# Altium PCB PCB1.PcbDoc
Units mil, origin at the board's own origin, x right, y up, seen from the top; angles counter-clockwise.
Board outline 5117.51 x 6310.03 mil, 2 copper layers (Top Layer, Bottom Layer); 27 components, 56 nets, 227 pads, 110 vias.
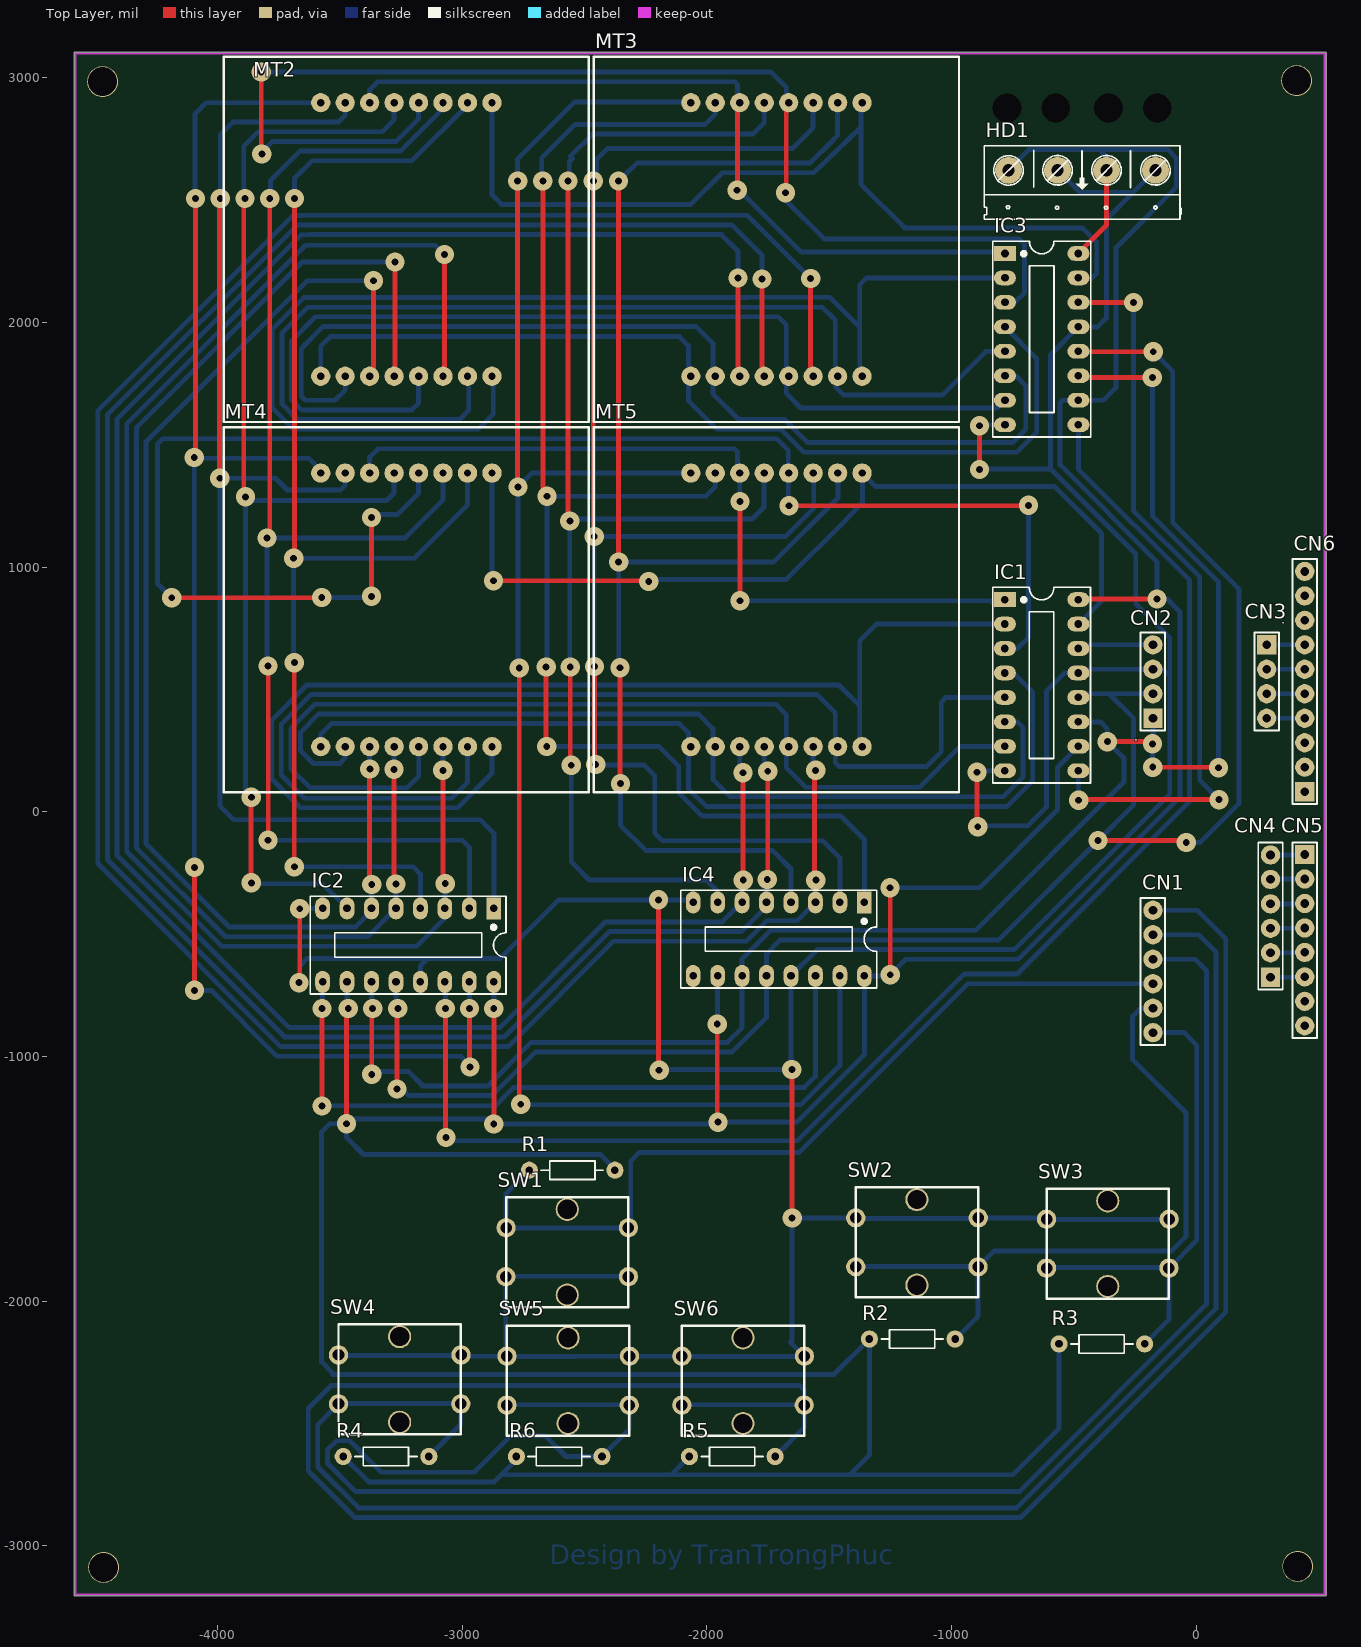
[diagram p0: Top Layer view]
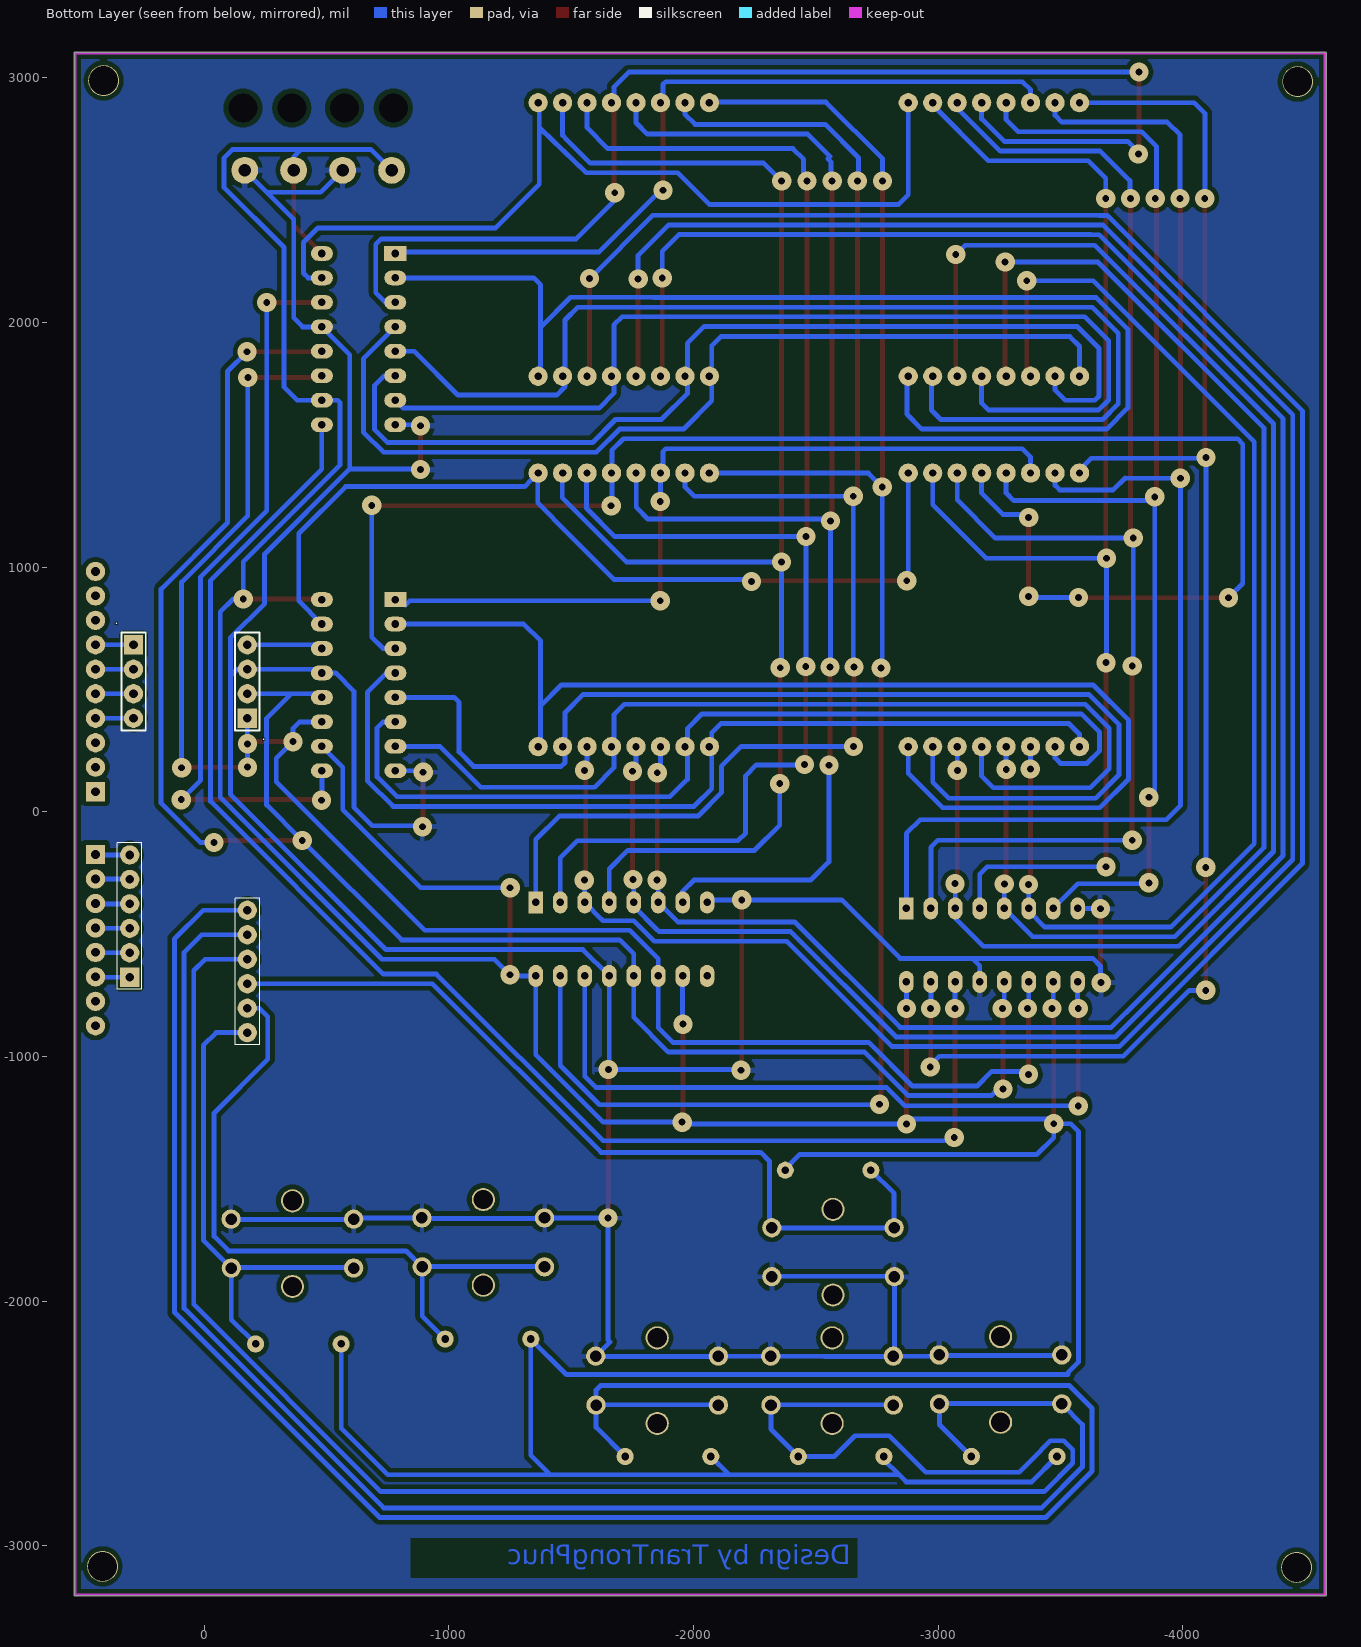
[diagram p1: Bottom Layer view, seen from below]
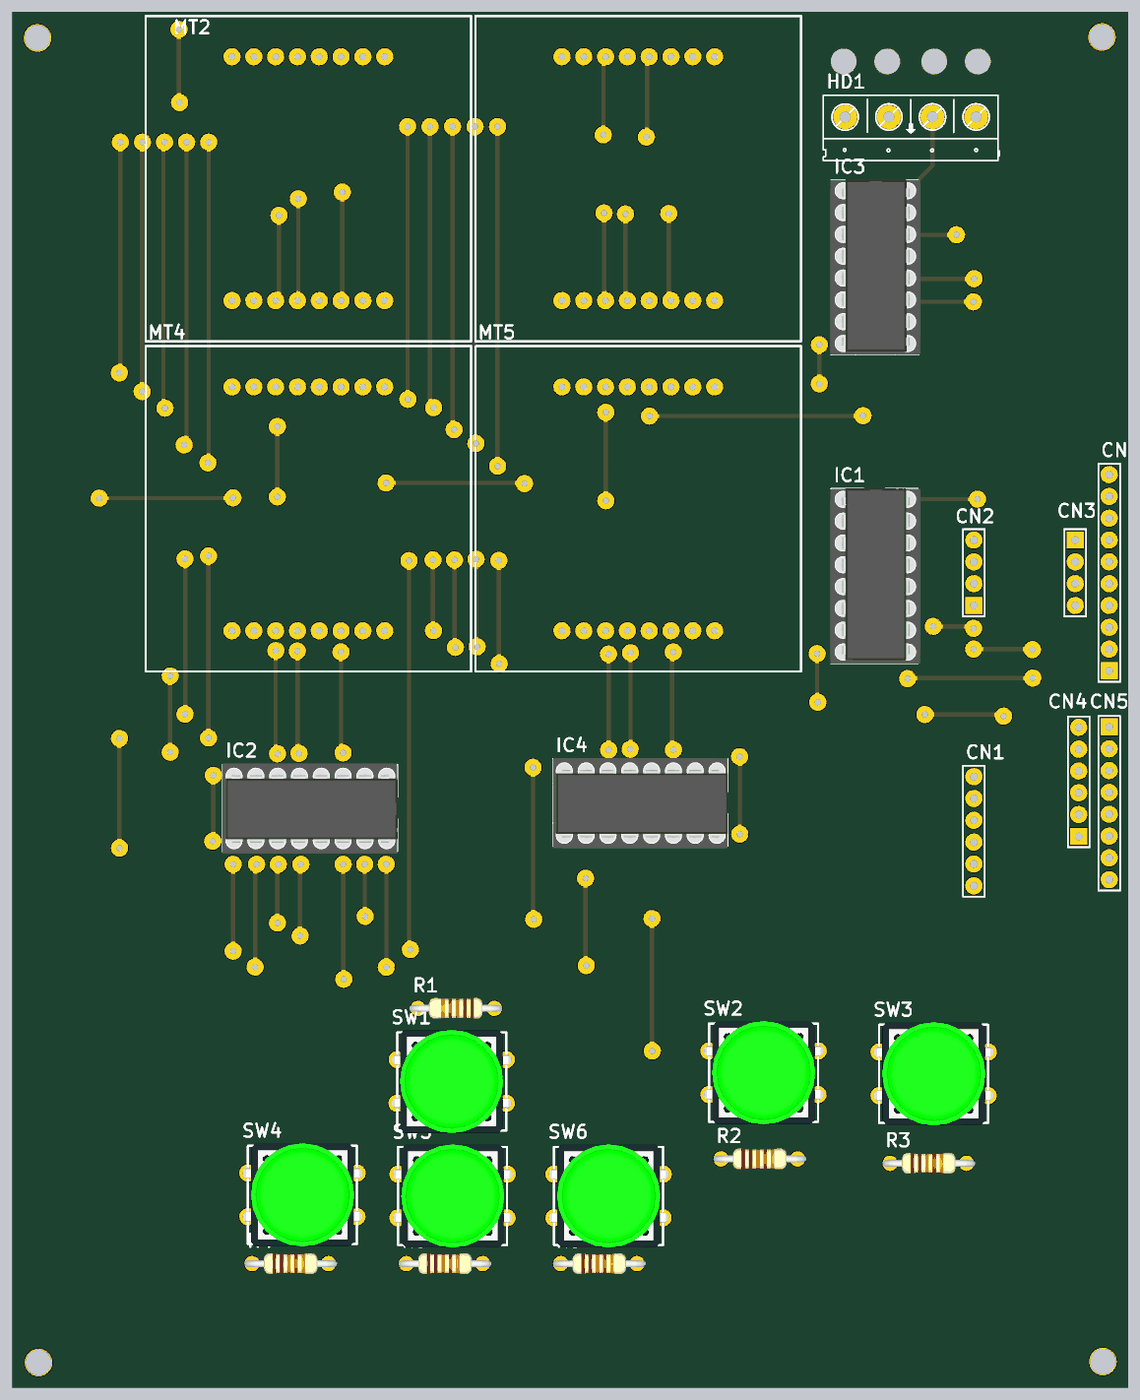
[diagram p2: 3D render of the assembled board from above, using the file's embedded part models]

## Layer stack, top to bottom
Top Solder: solder mask 0.4, Solder Resist, Dk 3.5
Top Layer: signal copper 1.4
Dielectric 1: dielectric 12.6, FR-4, Dk 4.8
Bottom Layer: signal copper 1.4
Bottom Solder: solder mask 0.4, Solder Resist, Dk 3.5

## Board outline
-4580.71,-3205.01 cw(c-4580.71,-3200) -4585.72,-3200 -4585.72,3100 cw(c-4580.71,3100) -4580.71,3105.02 526.77,3105.02 cw(c526.77,3100) 531.79,3100 531.79,-3200 cw(c526.77,-3200) 526.77,-3205.01

## Design rules (kind name [scope] priority, off if disabled: settings)
Clearance [All] p1: gap=19.68 ignorepadtopadclearanceinfootprint=FALSE
PolygonConnect [All] p1: connectstyle=Relief reliefconductorwidth=19.68 reliefentries=4 polygonreliefangle="90 Angle" airgapwidth=19.68
RoutingVias [All] p1: holewidth=28 width=78.74 viastyle="Through Hole" minholewidth=28 minwidth=78.74 maxholewidth=28 maxwidth=78.74
ShortCircuit [All] p1 off: allowed=FALSE
SolderMaskExpansion [All] p1: expansion=4
Width [All] p1: maxlimit=19.68 minlimit=19.68 preferedwidth=19.68
29 further rules are at their usual default settings.

## Components (designator, comment, footprint, x,y, rotation, side; value= is the part's Value field where it differs from the comment)
CN1 "IO" CON.HDR1X6#1 -176.3,-402.72 r270 top
CN2 "IO" CON.HDR1X4 -176.3,382.28 r90 top
CN3 "IO" CON.HDR1X4 288.7,682.28 r270 top
CN4 "IO" CON.HDR1X6#2 304.33,-676.38 r90 top
CN5 "CON.HDR1x8" HDR1X8 444.09,-174.8 r270 top
CN6 "CON.HDR1x10" HDR1X10 444.09,82.28 r90 top
HD1 "Header 4" HED4 -165.94,2621.85 r180 top
IC1 "74HC595" DIP16 -781.3,867.28 r270 top
IC2 "74HC595" DIP16 -2870,-395 r180 top
IC3 "74HC595" DIP16 -780.94,2281.85 r270 top
IC4 "74HC595" DIP16 -1355.51,-370.63 r180 top
MT2 "Matrix 8x8S" matrix -3227.56,2338.98 r0 top
MT3 "Matrix 8x8S" matrix -1714.96,2338.98 r0 top
MT4 "Matrix 8x8S" matrix -3227.56,825.2 r0 top
MT5 "Matrix 8x8S" matrix -1714.96,825.2 r0 top
R1 "1k" R1/4W -2725,-1465 r0 top value="R1/4W - 1K"
R2 "1k" R1/4W -985,-2155 r180 top value="R1/4W - 1K"
R3 "1k" R1/4W -210,-2175 r180 top value="R1/4W - 1K"
R4 "1k" R1/4W -3135.63,-2635 r180 top value="R1/4W - 1K"
R5 "1k" R1/4W -1720.63,-2635 r180 top value="R1/4W - 1K"
R6 "1k" R1/4W -2428.13,-2635 r180 top value="R1/4W - 1K"
SW1 "SW-4P-B" SW-4P-B -2571,-1800 r180 top
SW2 "SW-4P-B" SW-4P-B -1140,-1760 r0 top
SW3 "SW-4P-B" SW-4P-B -360,-1765 r0 top
SW4 "SW-4P-B" SW-4P-B -3254,-2320 r0 top
SW5 "SW-4P-B" SW-4P-B -2565.63,-2325 r0 top
SW6 "SW-4P-B" SW-4P-B -1850.63,-2325 r0 top

## Footprints (in the part's own frame and the unit in brackets; to place one, negate y for a bottom-side part, rotate by r counter-clockwise, add the part's x,y. Pads: shape width x height; smd on the part's side, far side on the other; paste and mask are expansions set on the pad)
CON.HDR1X4 [mm]
  rect 2x2 hole 0.9: 1(0,0)
  round 2 hole 0.9: 2(2.54,0) 3(5.08,0) 4(7.62,0)
  silkscreen extent -1.27,-1.27 8.89,1.27, body extent -1.27,-1.27 8.89,1.27, height 8.89
CON.HDR1X6#1 [mm]
  round 2 hole 0.9: 1(0,0) 2(2.54,0) 3(5.08,0) 4(7.62,0) 5(10.16,0) 6(12.7,0)
  silkscreen extent -1.27,-1.27 13.97,1.27, body extent -1.27,-1.27 13.97,1.27, height 8.89
CON.HDR1X6#2 [mm]
  rect 2x2 hole 0.9: 1(0,0)
  round 2 hole 0.9: 2(2.54,0) 3(5.08,0) 4(7.62,0) 5(10.16,0) 6(12.7,0)
  silkscreen extent -1.27,-1.27 13.97,1.27, body extent -1.27,-1.27 13.97,1.27, height 8.89
DIP16 [mil]
  rect 60x90 hole 31: 1(0,0)
  oval 60x90 hole 31: 2(100,0) 3(200,0) 4(300,0) 5(400,0) 6(500,0) 7(600,0) 8(700,0) 9(700,300) 10(600,300) 11(500,300) 12(400,300) 13(300,300) 14(200,300) 15(100,300) 16(0,300)
  silkscreen extent -50,-50 750,350, body extent -52,-53 752,360, height 317
HDR1X8 [mm] "Connector; Header; 8 Position"
  rect 2x2 hole 0.9: 1(0,0)
  round 2 hole 0.9: 2(2.54,0) 3(5.08,0) 4(7.62,0) 5(10.16,0) 6(12.7,0) 7(15.24,0) 8(17.78,0)
  silkscreen extent -1.27,-1.27 19.05,1.27
HDR1X10 [mm] "Connector; Header; 10 Position"
  rect 2x2 hole 0.9: 1(0,0)
  round 2 hole 0.9: 2(2.54,0) 3(5.08,0) 4(7.62,0) 5(10.16,0) 6(12.7,0) 7(15.24,0) 8(17.78,0) 9(20.32,0) 10(22.86,0)
  silkscreen extent -1.27,-1.27 24.13,1.27
HED4 [mil] "Header 4, 4 pin, hight 300mil, Pin to Pin 200, Colour Green"
  round 110 hole 50: 1(0,0) 2(200,0) 3(400.06,0.06) 4(600.39,0.39)
  silkscreen extent -106,-100 700,200
matrix [mm]
  round 2 hole 0.762: 1(-8.89,-14.2) 2(-6.35,-14.2) 3(-3.81,-14.2) 4(-1.27,-14.2) 5(1.27,-14.2) 6(3.81,-14.2) 7(6.35,-14.2) 8(8.89,-14.2) 9(8.89,14.2) 10(6.35,14.2) 11(3.81,14.2) 12(1.27,14.2) 13(-1.27,14.2) 14(-3.81,14.2) 15(-6.35,14.2) 16(-8.89,14.2)
  silkscreen extent -18.95,-18.95 18.95,18.95
R1/4W [mil] "R 1/4W, 2 Pin, 350mil"
  round 70 hole 31: 1(0,0) 2(350,0)
  silkscreen extent 48,-38 302,38, body extent -40,-47 386,47, height 111
SW-4P-B [mm] "Nut bam lon"
  round 2 hole 1.2: 1(-6.375,2.54) 2(-6.375,-2.54) 3(6.325,-2.54) 4(6.35,2.54)
  round 2.4 hole 2: ""(-0.025,4.445) ""(-0.025,-4.445)
  silkscreen extent -6.38,-5.72 6.32,5.72, body extent -6.94,-6 6.94,6, height 9.5

## Part data
CN1 CN4: library part CON.HDR1x6, "Header 1x6", ComponentLink1Description="Digikey Part link", ComponentLink2Description="Open DataSheet", ComponentLink2URL=H:\LIBRARY\LIBRARY.Datasheet\, Publisher="Hoang Nguyen"
CN2 CN3: library part CON.HDR1x4, "Header 1x4", ComponentLink1Description="Digikey Part link", ComponentLink2Description="Open DataSheet", ComponentLink2URL=H:\LIBRARY\LIBRARY.Datasheet\, Publisher="Hoang Nguyen"
CN5: "Header 1x8", ComponentLink1Description="Digikey Part link", ComponentLink2Description="Open DataSheet", ComponentLink2URL=H:\LIBRARY\LIBRARY.Datasheet\, Publisher="Hoang Nguyen"
CN6: "Header 1x10", ComponentLink1Description="Digikey Part link", ComponentLink2Description="Open DataSheet", ComponentLink2URL=H:\LIBRARY\LIBRARY.Datasheet\, Publisher="Hoang Nguyen"
HD1: "Header 4 (Green)"
IC1 IC2 IC3 IC4: library part 74595, "8 Bit Serial input - Parallel Output"
MT2 MT3 MT4 MT5: library part "LED 8x8S", "Matrix 8x8,  Single colour"
R1 R2 R3 R4 R5 R6: library part R1/4W, "Resistor 1/4W"
SW1 SW2 SW3 SW4 SW5 SW6: library part SW-4PIN-BIG, "Switch Big 4 Pin"

## Free pads (board coordinates)
  round 125.98 hole 118.11: 2(-4469.29,2984.09) 2(-4464.8,-3088.58) 2(410.87,2988.58) 2(415.35,-3084.09)
  round 60 hole 118.11: 2(415.35,-3084.09) 3(-773.23,2876.38) 3(-358.27,2876.38) 4(-573.62,2876.38) 4(-158.66,2876.38)

## Via types
v1: diameter 78.74, hole 28, Top Layer to Bottom Layer, 110 vias

## Nets (pads, with @x,y where several pads share a name; then routed paths per layer and width w, separated by ;. In a path a pad name is that pad's centre, name@x,y a point inside that pad or via, vN(x,y) a via of type N, cw(c..) or ccw(c..) an arc to the next point about the centre after c; other vN are vias at no path point)
bottom: CN1.3 R6.1 SW5.2 SW5.3 | length 7661.3
  Bottom Layer w19.68: SW5.2 -2816.63,-2423.23 -2318.4,-2423.23 SW5.3 -2316.63,-2523.5 R6.1 -2575,-2635 -2660,-2550 -2800,-2550 -2949.53,-2699.53 -3330.47,-2699.53 -3421.1,-2608.9 -3421.1,-2608.27 -3458.9,-2570.47 -3512.36,-2570.47 -3550.16,-2608.27 -3550.16,-2639.05 -3550.16,-2661.73 -3433.62,-2778.27 -722.01,-2778.27 42.52,-2013.74 42.52,-648.82 -3.58,-602.72 CN1.3
c1: IC2.15 MT2.16 MT4.16 | length 6263.8
  Top Layer w19.68: v1(-4094.49,1448.03) -4089.76,1452.76 v1(-4089.76,2506.3) ; v1(-4093.7,-227.17) -4093.7,-729.53 v1(-4093.31,-729.92) ; v1(-2969.29,-804.33) -2969.29,-1040.95 v1(-2967.32,-1042.91)
  Bottom Layer w19.68: v1(-4094.49,1448.03) v1@-4094.49,1444.49 ; v1(-4093.7,-227.17) -4090.16,-227.17 -4094.49,-222.83 v1@-4094.49,1444.49 ; v1(-4093.31,-729.92) -4025.76,-729.92 -3756.47,-999.21 -3004.72,-999.21 -2967.32,-1036.61 v1(-2967.32,-1042.91) ; v1(-4089.76,2506.3) -4090.94,2507.49 -4090.94,2853.54 -4046.46,2898.03 MT2.16@-3578.35,2898.03 ; MT4.16@-3577.56,1396.06 -3625.98,1444.49 v1@-4094.49,1444.49 ; MT2.16 MT2.16@-3578.35,2898.03 ; MT2.16@-3577.56,2898.82 MT2.16@-3578.35,2898.03 ; IC2.15 -2970,-797.71 v1@-2969.29,-798.42
c2: IC2.1 MT2.15 MT4.15 | length 5414.6
  Top Layer w19.68: v1@-3990.94,2493.7 -3990.94,1364.17 v1(-3989.76,1362.99)
  Bottom Layer w19.68: v1@-3990.94,2493.7 v1@-3990.94,2506.3 ; v1(-3988.48,2506.3) -3988.48,2766.25 -3936.22,2818.5 -3505.12,2818.5 -3477.56,2846.06 MT2.15 MT2.15@-3477.56,2898.82 ; MT4.15@-3477.56,1396.06 MT4.15 -3477.56,1333.86 -3496.06,1315.35 -3715.35,1315.35 -3764.17,1364.17 -3765.35,1362.99 v1(-3989.76,1362.99) -3989.76,25.2 -3932.28,-32.28 -2925.91,-32.28 -2870,-88.19 IC2.1
c3: IC2.2 MT2.11 MT4.11 | length 5543.9
  Top Layer w19.68: v1(-3797.24,1118.5) -3785.92,1129.82 v1(-3785.92,2506.3) ; v1(-3793.31,-116.14) -3792.13,-114.96 -3792.13,594.49 v1(-3793.31,595.67)
  Bottom Layer w19.68: v1(-3793.31,595.67) -3797.24,599.61 v1(-3797.24,1118.5) -3233.62,1118.5 -3077.56,1274.57 MT4.11 MT4.11@-3077.56,1396.06 ; v1@-3784.25,-116.14 -2998.86,-116.14 -2970,-145 IC2.2 ; v1@-3783.46,2498.81 -3783.46,2579.54 -3662.6,2700.39 -3253.38,2700.39 -3077.56,2876.21 MT2.11 MT2.11@-3077.56,2898.82
c4: IC2.3 MT2.6 MT4.6 | length 6087.1
  Top Layer w19.68: v1@-3077.56,-293.7 v1@-3077.56,169.29 ; MT2.6@-3072.64,1769.49 -3067.64,1774.49 -3072.05,1778.9 v1(-3072.05,2277.56)
  Bottom Layer w19.68: v1(-3078.35,169.29) -3077.56,170.08 MT4.6 ; v1(-3072.05,2277.56) -3110.24,2315.75 -3639.76,2315.75 -4370.47,1585.04 -4370.47,-162.5 -3982.97,-550 -3185,-550 -3070,-435 IC2.3 -3070,-295.2 v1(-3068.5,-293.7)
c5: IC2.4 MT2.10 MT4.10 | length 5273.5
  Top Layer w19.68: v1(-3688.19,1036.22) -3688.19,1047.95 -3684.65,1051.5 v1(-3684.65,2506.3) ; v1(-3685.43,-225) v1(-3685.43,609.45) ; v1@-3681.1,-214.17 -3672.64,-222.64 v1@-3675,-225
  Bottom Layer w19.68: v1(-3685.43,609.45) -3688.19,612.2 v1(-3688.19,1036.22) -3195.91,1036.22 -2977.56,1254.57 MT4.10 MT4.10@-2977.56,1396.06 ; v1(-3684.65,2506.3) -3684.65,2589.37 -3612.99,2661.02 -3205.12,2661.02 -2977.56,2888.58 MT2.10 MT2.10@-2977.56,2898.82 ; v1@-3675,-225 -3200,-225 -3170,-255 IC2.4
c6: IC2.5 MT2.4 MT4.4 | length 5459.9
  Top Layer w19.68: v1@-3277.56,-295.67 v1@-3277.56,173.23 ; v1(-3273.62,2246.85) -3273.62,1779.92 -3278.35,1775.2 MT2.4@-3272.64,1769.49
  Bottom Layer w19.68: v1(-3278.34,173.23) -3277.56,174.01 MT4.4 ; v1(-3273.62,2246.85) -3652.98,2246.85 -4331.1,1568.73 -4331.1,-146.19 -3966.66,-510.63 -3385.63,-510.63 IC2.5 -3270,-298.5 -3272.83,-295.67 v1(-3270.47,-295.67)
c7: IC2.6 MT2.3 MT4.3 | length 5011.9
  Top Layer w19.68: v1@-3377.56,-297.64 v1@-3377.56,175.2 ; MT2.3@-3372.64,1769.49 -3362.2,1779.92 v1(-3362.2,2170.47)
  Bottom Layer w19.68: MT4.3 -3377.56,175.98 v1(-3376.77,175.2) ; v1(-3368.9,-297.64) -3370,-298.74 IC2.6 -3370,-405 -3436.26,-471.26 -3950.35,-471.26 -4291.73,-129.88 -4291.73,1511.81 -3633.07,2170.47 v1(-3362.2,2170.47)
c8: IC2.7 MT2.13 MT4.13 | length 4910.2
  Top Layer w19.68: v1@-3892.13,2496.06 -3892.13,1294.09 v1(-3885.04,1287.01) ; v1(-3861.02,-290.55) -3862.2,-289.37 -3862.2,57.87 v1(-3861.02,59.06)
  Bottom Layer w19.68: v1@-3892.13,2496.06 -3892.13,2719.29 -3832.28,2779.13 -3326.77,2779.13 -3277.56,2828.35 MT2.13 MT2.13@-3277.56,2898.82 ; v1@-3885.04,-294.09 -3570.91,-294.09 IC2.7 ; v1@-3885.04,69.68 v1(-3885.04,1287.01) -3869.68,1271.65 -3308.66,1271.65 -3277.56,1302.76 MT4.13 MT4.13@-3277.56,1396.06
  other v1: -3887.2,2506.3
c9: IC4.15 MT3.16 MT5.16 | length 7131.6
  Top Layer w19.68: v1(-2772.83,2577.95) -2772.83,1329.13 v1(-2771.26,1327.56) ; v1(-2766.14,587.8) -2766.14,-1188.98 v1(-2759.84,-1195.28)
  Bottom Layer w19.68: v1(-2772.83,2577.95) -2772.83,2668.5 -2540.94,2900.39 -2076.38,2900.39 MT3.16@-2074.8,2898.82 ; v1(-2766.14,587.8) -2771.26,592.91 v1(-2771.26,1327.56) -2714.57,1384.25 MT5.16 ; v1(-2759.84,-1195.28) -2757.87,-1197.24 -1615.69,-1197.24 -1455.51,-1037.07 IC4.15
c10: IC4.1 MT3.15 MT5.15 | length 5807.5
  Top Layer w19.68: v1(-2669.68,2577.95) -2669.68,1305.91 v1(-2653.15,1289.37) ; v1(-2656.29,591.34) -2656.29,269.29 v1(-2653.94,266.93)
  Bottom Layer w19.68: v1@-2674.4,2564.96 -2674.4,2672.45 -2537.8,2809.06 -2006.69,2809.06 -1964.96,2850.79 MT3.15 ; v1(-2656.29,591.34) -2656.29,600.01 -2653.15,603.15 v1(-2653.15,1289.37) -2003.54,1289.37 -1964.96,1327.95 MT5.15 ; v1(-2653.94,266.93) -2195.28,266.93 -2114.17,185.83 -2114.17,78.18 -2018.28,-17.72 -1451.18,-17.72 -1355.51,-113.39 IC4.1 ; MT5.15@-1974.8,1384.25 MT5.15@-1974.8,1396.06 ; MT3.15@-1974.8,2898.03 MT3.15@-1974.8,2898.82
c11: IC4.2 MT3.11 MT5.11 | length 6165
  Top Layer w19.68: v1@-2480,1129.92 v1@-2480,1125.28 ; v1@-2474.8,1150 -2474.8,1139.77 -2484.65,1129.92 v1@-2480,1125.28 ; v1(-2463.39,2577.95) -2463.39,1128.74 v1(-2459.45,1124.8) -2479.53,1124.8 v1@-2480,1125.28 ; v1(-2458.66,594.09) -2458.66,197.64 v1(-2453.94,192.91)
  Bottom Layer w19.68: v1(-2458.66,594.09) -2459.45,594.88 v1(-2459.45,1124.8) -1678.12,1124.8 -1562.6,1240.32 -1562.6,1383.86 MT5.11@-1574.8,1396.06 ; v1(-2453.94,192.91) -2452.36,191.34 -2257.09,191.34 -2212.6,146.85 -2212.6,-87.4 -2181.5,-118.5 -1525.2,-118.5 -1455.51,-188.19 IC4.2 ; v1@-2452.76,2575.2 v1@-2452.76,2577.95 ; v1@-2449.8,2577.95 -2449.8,2667.13 -2406.3,2710.63 -1650,2710.63 -1564.96,2795.67 MT3.11 ; MT3.11@-1574.8,2898.82 MT3.11@-1570.47,2894.49
c12: IC4.3 MT3.6 MT5.6 | length 9748.2
  Top Layer w19.68: v1(-1575.2,2179.13) -1575.2,1781.1 MT3.6@-1574.8,1780.71 ; v1@-1559.84,-283.86 -1559.84,169.29 v1@-1559.84,176.38
  Bottom Layer w19.68: v1(-1575.2,2179.13) -1834.25,2438.19 -3655.32,2438.19 -3656.11,2437.4 -3690.16,2437.4 -4488.58,1638.98 -4488.58,-211.42 -3740.16,-959.84 -2811.87,-959.84 -2381.4,-529.37 -1839.25,-529.37 -1755.04,-445.16 -1630.85,-445.16 ; MT5.6 -1564.96,181.5 -1554.72,171.26 v1(-1554.72,169.29) ; v1(-1553.94,-279.53) -1555.51,-281.1 IC4.3 -1625.51,-440.63 ; -1630.85,-445.16 -1626.33,-440.63 -1625.51,-440.63 ; -1630.85,-445.16 -1630.04,-445.16 -1625.51,-440.63
c13: IC4.4 MT3.10 MT5.10 | length 5775.1
  Top Layer w19.68: v1(-2360.24,2577.95) -2360.24,1021.65 v1(-2359.84,1021.26) ; v1(-2354.33,588.58) -2354.33,116.54 v1(-2352.76,114.96)
  Bottom Layer w19.68: v1@-2356.69,588.58 -2356.69,594.09 -2359.84,597.24 v1(-2359.84,1021.26) -1725.98,1021.26 -1463.39,1283.86 -1463.39,1384.65 MT5.10@-1474.8,1396.06 ; v1(-2352.76,114.96) -2352.76,-54.33 -2249.21,-157.87 -1731.5,-157.87 -1655.51,-233.86 IC4.4 IC4.4@-1647.64,-362.76 ; v1@-2342.13,2577.95 -2342.13,2595.28 -2286.22,2651.18 -1577.95,2651.18 -1481.89,2747.24 ; -1482.02,2747.37 -1464.96,2764.43 MT3.10 ; MT3.10@-1474.8,2898.03 MT3.10@-1474.8,2898.82
c14: IC4.5 MT3.4 MT5.4 | length 9249.2
  Top Layer w19.68: MT3.4@-1774.8,1780.71 -1774.02,1781.5 -1780.71,1788.19 -1773.62,1795.28 v1(-1773.62,2177.16) ; v1@-1750.79,-286.22 v1@-1750.79,157.09
  Bottom Layer w19.68: v1(-1773.62,2177.16) -1773.62,2273.62 -1898.43,2398.43 -3639.41,2398.43 -3639.8,2398.03 -3673.85,2398.03 -4449.21,1622.67 -4449.21,-195.11 -3723.85,-920.47 -2828.18,-920.47 -2397.71,-490 -1859.2,-490 -1850.74,-481.54 -1755.51,-386.31 IC4.5 -1755.51,-280.32 v1(-1752.36,-277.16) ; MT5.4 -1764.96,166.54 -1763.78,165.35 v1(-1750.39,165.35)
c15: IC4.6 MT3.3 MT5.3 | length 8889.2
  Top Layer w19.68: MT3.3@-1874.8,1780.71 -1864.57,1790.95 -1872.05,1798.43 v1(-1872.05,2181.5) ; v1@-1851.57,-282.68 v1(-1851.57,159.45)
  Bottom Layer w19.68: -3976.78,-611.87 -4409.84,-178.8 -4409.84,1606.36 -3657.54,2358.66 -3623.49,2358.66 -3623.1,2359.06 -1940.16,2359.06 -1872.05,2290.94 v1(-1872.05,2181.5) ; -3976.77,-611.87 -3818.64,-770 -3707.54,-881.1 -2844.49,-881.1 -2414.02,-450.63 -2173.62,-450.63 ; -2173.62,-450 -1935.7,-450 -1856.33,-370.63 IC4.6 -1855.51,-284.25 v1(-1850.79,-279.53) ; MT5.3 -1864.96,164.57 -1859.84,159.45 v1(-1851.57,159.45)
c16: IC4.7 MT3.13 MT5.13 | length 5577
  Top Layer w19.68: v1@-2567.71,1204.53 -2576.38,1195.87 -2569.09,1188.58 v1(-2559.45,1188.58) -2566.54,1195.67 v1(-2566.54,2577.95) ; v1(-2557.48,591.34) -2557.48,194.09 v1(-2553.54,190.16)
  Bottom Layer w19.68: v1@-2568.11,2570.47 v1@-2568.11,2577.95 ; v1@-2561.81,2575.19 -2561.81,2656.7 -2548.82,2669.68 -2557.48,2678.35 -2466.14,2769.69 -1811.02,2769.69 -1764.96,2815.75 MT3.13 ; v1(-2557.48,591.34) -2560.23,588.58 -2563.39,588.58 -2559.45,592.52 v1(-2559.45,1188.58) -2565.16,1188.58 -2573.03,1196.46 -1813.78,1196.46 -1765.75,1244.49 -1765.75,1387.01 MT5.13@-1774.8,1396.06 ; v1(-2553.54,190.16) -2553.54,-204.88 -2479.53,-278.9 -2002.24,-278.9 -1955.51,-325.63 IC4.7 ; MT3.13@-1774.8,2898.82 MT3.13@-1773.23,2897.24
chon: CN1.5 R2.1 SW2.2 SW2.3 | length 2825.9
  Bottom Layer w19.68: SW2.2 -1391,-1858.23 -892.77,-1858.23 SW2.3 ; R2.1 -891,-2061 SW2.3 ; CN1.5 -225.55,-802.72 -260.24,-837.4 -260.24,-1011.42 -40.55,-1231.1 -40.55,-1735.55 -100,-1795 -825,-1795 -890,-1860 SW2.3
chot: CN2.2 IC1.12 IC2.12 IC3.12 IC4.12 | length 7881.8
  Top Layer w19.68: v1(-3265.35,-1132.68) v1@-3265.35,-785.43 ; IC3.12 -479.41,1880.31 v1(-175.2,1880.31) ; v1(-400.79,-117.72) -47.64,-117.72 v1(-40.16,-125.2) ; CN2.2@-201.3,482.28 CN2.2 -166.3,472.28 -161.3,477.28 CN2.2@-158.82,474.8
  Bottom Layer w19.68: IC2.12 -3270,-774.88 v1@-3262.2,-782.68 ; v1(-3265.35,-1132.68) -3248.03,-1129.92 -3217.72,-1160.24 -2877.33,-1160.24 -2868.11,-1151.02 -2868.11,-1150.43 -2699.96,-982.28 -1897.24,-982.28 -1755.51,-840.55 IC4.12 -1755.51,-580.63 -1698.78,-523.9 -806.97,-523.9 v1(-400.79,-117.72) -255.12,27.95 -255.12,381.5 -355.91,482.28 ; IC1.12 -466.3,482.28 -355.91,482.28 ; CN2.2@-201.3,482.28 -355.91,482.28 ; v1(-175.2,1880.31) -95.28,1800.39 -95.28,1181.6 176.14,910.18 176.14,34.61 16.33,-125.2 v1(-40.16,-125.2)
  other v1: -3262.2,-804.33
data: CN2.4 IC1.14 | length 311.2
  Bottom Layer w19.68: IC1.14 -466.3,682.28 CN2.4
GND: CN2.3 HD1.1 HD1.3 IC1.8 IC1.13 IC2.8 IC2.13 IC3.8 IC3.13 IC4.8 IC4.13 SW1.1 SW1.4 SW2.1 SW2.4 SW3.1 SW3.4 SW4.1 SW4.4 SW5.1 SW5.4 SW6.1 SW6.4 | length 16917.7
  Top Layer w19.68: v1(-3666.14,-698.43) -3662.99,-695.28 v1(-3662.99,-396.46) ; v1(-2197.24,-360) -2197.24,-1053.54 v1(-2194.49,-1056.3) ; v1@-1655.51,-1689.76 -1650.79,-1685.04 v1(-1650.79,-1660.24) -1651.97,-1659.06 v1(-1651.97,-1053.15) ; IC4.13 IC4.13@-1655.51,-645.63 ; v1(-894.88,161.42) -894.88,-58.27 v1(-892.13,-61.02) ; v1(-884.64,1398.43) v1(-884.64,1577.95) ; IC1.8 IC1.8@-771.3,157.28
  Bottom Layer w19.68: v1(-3666.14,-698.43) -3662.99,-695.28 -3662.99,-630.32 -3631.89,-599.21 -3139.21,-599.21 ; v1(-3662.99,-396.46) -3656.69,-396.46 -3655.24,-395 IC2.8 ; SW4.1 -3505,-2221.77 -3005.77,-2221.77 SW4.4 -2999,-2225 SW5.1 ; IC2.13 -3170,-630 -3139.21,-599.21 ; SW1.1 -2321.77,-1898.23 -2821,-1898.23 SW1.4 -2821,-2220.63 SW5.1 ; v1(-2194.49,-1056.3) -2191.34,-1053.15 v1(-1651.97,-1053.15) -1655.51,-1049.61 IC4.13 -1548.15,-563.27 -743.13,-563.27 -107.4,72.46 -107.4,710.82 -246.85,850.27 -246.85,1053.51 -594.84,1401.5 ; IC4.8 -2066.14,-360 v1(-2197.24,-360) -2605,-360 -2844.21,-599.21 -3139.21,-599.21 ; v1(-894.88,161.42) -889.02,167.28 IC1.8 ; v1(-892.13,-61.02) -888.19,-57.09 -687.02,-57.09 -611.81,18.13 -611.81,492.52 -537.05,567.28 IC1.13 -466.3,582.28 CN2.3 -134.13,582.28 -111.3,559.45 ; v1(-884.64,1398.43) -883.86,1398.43 -882.68,1397.24 -882.68,1395.67 -876.84,1401.5 -594.84,1401.5 ; v1(-884.64,1577.95) -880.74,1581.85 IC3.8 ; HD1.3 -476.07,2531.85 -255.94,2531.85 ; HD1.1 -255.94,2531.85 ; SW3.4 -110,-1666.77 -609.23,-1666.77 SW3.1 -616,-1660 SW2.4 -890,-1661.77 -1389.23,-1661.77 SW2.1 -1391.24,-1660.24 v1(-1650.79,-1660.24) -1650.79,-2159.88 -1658.27,-2167.36 SW6.4 -1600.63,-2226.77 -2099.86,-2226.77 SW6.1 SW5.4 -2533.06,-2225 -2534.83,-2226.77 -2816.63,-2226.77 SW5.1 ; -594.84,1401.5 -594.84,1867.95 IC3.13 -402.4,1981.85 -365.94,2018.31 -365.94,2421.85 -255.94,2531.85
left: CN1.2 R4.1 SW4.2 SW4.3 | length 6886.6
  Bottom Layer w19.68: R4.1 -3005,-2504.37 SW4.3 -3006.77,-2418.23 -3505,-2418.23 SW4.2 -3589.53,-2504.53 -3589.53,-2678.04 -3422.56,-2845 -733.07,-2845 81.89,-2030.04 81.89,-574.02 10.59,-502.72 CN1.2
NetCN3_1: CN3.1 CN6.7 | length 155.4
  Bottom Layer w19.68: CN3.1 CN6.7
NetCN3_2: CN3.2 CN6.6 | length 155.4
  Bottom Layer w19.68: CN3.2 CN6.6
NetCN3_3: CN3.3 CN6.5 | length 155.4
  Bottom Layer w19.68: CN3.3 CN6.5
NetCN3_4: CN3.4 CN6.4 | length 155.4
  Bottom Layer w19.68: CN3.4 CN6.4
NetCN4_1: CN4.1 CN5.6 | length 140.4
  Bottom Layer w19.68: CN4.1 442.52,-676.38 CN5.6
NetCN4_2: CN4.2 CN5.5 | length 140.4
  Bottom Layer w19.68: CN4.2 442.52,-576.38 CN5.5
NetCN4_3: CN4.3 CN5.4 | length 140.4
  Bottom Layer w19.68: CN4.3 442.52,-476.38 CN5.4
NetCN4_4: CN4.4 CN5.3 | length 140.4
  Bottom Layer w19.68: CN4.4 442.52,-376.38 CN5.3
NetCN4_5: CN4.5 CN5.2 | length 140.4
  Bottom Layer w19.68: CN4.5 305.91,-274.8 CN5.2
NetCN4_6: CN4.6 CN5.1 | length 140.4
  Bottom Layer w19.68: CN4.6 442.52,-176.38 CN5.1
NetIC1_9: IC1.9 IC3.14 | length 3105.9
  Top Layer w19.68: IC3.14 v1(-255.94,2081.85) ; v1(-479.92,46.85) -477.17,49.61 v1(93.7,49.61)
  Bottom Layer w19.68: IC1.9 -481.3,48.23 v1(-479.92,46.85) ; v1@-250.28,2076.18 v1(-255.94,2081.85) -255.94,1230.91 14.8,960.17 14.8,128.5 v1(93.7,49.61)
NetIC2_9: IC2.9 IC4.14 | length 2986.8
  Top Layer w19.68: v1(-3572.44,-1202.36) v1(-3572.44,-804.33) v1@-3572.44,-777.95
  Bottom Layer w19.68: v1(-3572.44,-1202.36) -3571.65,-1201.57 -2862.99,-1201.57 -2828.74,-1167.32 -2828.74,-1166.74 -2788.38,-1126.38 -2731.3,-1126.38 -2730.91,-1126.77 -1600.89,-1126.77 -1555.51,-1081.39 IC4.14 ; v1@-3572.44,-777.95 -3570,-775.51 IC2.9
NetIC2_14: IC2.14 IC3.9 | length 6008.9
  Top Layer w19.68: v1(-3068.1,-804.33) -3068.1,-1309.3 -3074.4,-1315.6 -3065.35,-1324.65 v1(-3065.35,-1331.1)
  Bottom Layer w19.68: IC2.14 -3074.4,-699.4 -3052.76,-721.05 -3068.1,-736.4 v1(-3068.1,-804.33) ; v1(-3065.35,-1331.1) -3065.35,-1334.65 -3055.12,-1344.88 -1630.48,-1344.88 -948.95,-663.35 -731.85,-663.35 -26.38,42.13 -26.38,945.67 -480.94,1400.24 IC3.9
r1: IC1.15 MT4.9 MT5.9 | length 3701.9
  Top Layer w19.68: v1(-2871.26,944.09) -2239.37,944.09 v1(-2236.61,941.34)
  Bottom Layer w19.68: MT4.9 -2877.56,950.39 v1(-2871.26,944.09) ; v1(-2236.61,941.34) -2239.37,941.34 -2231.1,949.61 -1674.41,949.61 -1426.38,1197.64 -1426.38,1200 -1363.39,1262.99 -1363.39,1356.69 MT5.9@-1337.4,1356.69 ; MT5.9 MT5.9@-1337.4,1356.69 ; IC1.15 -386.3,862.28 -386.3,1137.28 -578.05,1329.04 -1309.74,1329.04 MT5.9@-1337.4,1356.69
r2: IC1.1 MT4.14 MT5.14 | length 3296.7
  Top Layer w19.68: v1@-1874.8,873.62 v1(-1863.78,862.6) v1(-1863.78,1267.72)
  Bottom Layer w19.68: MT4.14@-3377.56,1396.06 -3377.56,1449.37 -3342.91,1484.02 -1887.17,1484.02 -1874.8,1471.65 MT5.14@-1874.8,1396.06 ; v1@-1868.9,1267.72 -1864.96,1271.65 MT5.14 ; v1(-1863.78,862.6) -839.84,862.6 -822.91,845.67 -791.3,877.28 IC1.1
r3: IC1.2 MT4.8 MT5.8 | length 4909.5
  Bottom Layer w19.68: MT4.8@-2877.56,277.95 MT4.8 -2877.56,156.69 -3018.11,16.14 -3660.24,16.14 -3777.95,133.86 -3777.95,374.12 -3633.96,518.11 -1459.45,518.11 -1374.8,433.46 ; MT5.8@-1374.8,277.95 -1374.8,433.46 ; IC1.2 -1306.34,767.28 -1374.8,698.82 -1374.8,433.46
r4: IC1.3 MT4.12 MT5.12 | length 6613.7
  Top Layer w19.68: v1(-4186.61,874.41) -3573.23,874.41 -3565.75,866.93 -3565.75,868.11 v1(-3573.23,875.59) ; v1(-3369.68,880.31) v1(-3369.68,1202.76) ; v1(-1663.39,1250.79) -686.22,1250.79 v1(-684.65,1252.36)
  Bottom Layer w19.68: v1(-4186.61,874.41) -4245.11,932.91 -4245.11,1502.76 -4223.46,1524.41 -1713.78,1524.41 -1666.54,1477.17 -1666.54,1253.94 v1(-1663.39,1250.79) ; v1(-3573.23,875.59) -3374.41,875.59 v1(-3369.68,880.31) ; v1@-3371.26,1202.76 -3359.53,1214.49 -3265.04,1214.49 -3177.56,1301.97 MT4.12 MT4.12@-3177.56,1396.06 ; IC1.3 -731.3,667.28 -684.65,713.94 v1(-684.65,1252.36)
r5: IC1.4 MT4.1 MT5.1 | length 3794.1
  Bottom Layer w19.68: MT4.1@-3577.56,277.95 -3577.56,317.72 -3534.65,360.63 -2111.81,360.63 -2074.8,323.62 -2074.8,94.49 -2001.97,21.65 -772.07,21.65 -667.4,126.32 -667.4,487.98 -746.71,567.28 IC1.4
r6: IC1.5 MT4.7 MT5.7 | length 4676.4
  Bottom Layer w19.68: MT4.7@-2977.56,277.95 MT4.7 -2977.56,120.87 -3042.91,55.51 -3643.93,55.51 -3738.58,150.17 -3738.58,357.81 -3617.65,478.74 -1548.03,478.74 -1474.8,405.51 -1474.8,201.18 -1459.02,185.39 -1100.83,185.39 -1041.73,244.49 -1041.73,447.64 -1022.09,467.28 IC1.5
r7: IC1.6 MT4.2 MT5.2 | length 3911.9
  Bottom Layer w19.68: MT4.2@-3477.56,277.95 MT4.2 -3477.56,220.08 -3500.39,197.24 -3607.77,197.24 -3659.84,249.32 -3659.84,325.2 -3585.04,400 -2034.65,400 -1974.8,340.16 -1974.8,132.28 -1903.54,61.02 -788.37,61.02 -706.77,142.63 -706.77,157.48 -706.77,342.76 -731.3,367.28 IC1.6
r8: IC1.7 MT4.5 MT5.5 | length 4172.9
  Bottom Layer w19.68: MT4.5@-3177.17,277.56 -3177.17,145.67 -3224.8,98.03 -3620.87,98.03 -3699.21,176.38 -3699.21,341.5 -3601.35,439.37 -1716.93,439.37 -1674.8,397.24 MT5.5@-1674.8,282.28 ; MT5.5@-1670.47,277.95 MT5.5@-1674.8,282.28 ; IC1.7 -963.26,267.28 -1130.15,100.39 -1595.67,100.39 -1674.8,179.53 MT5.5@-1674.8,282.28
r9: IC3.15 MT2.9 MT3.9 | length 3632.7
  Bottom Layer w19.68: MT2.9@-2877.56,2898.82 MT2.9 -2877.56,2521.65 -2838.19,2482.28 -2064.96,2482.28 -1935.43,2611.81 -1561.65,2611.81 -1369.68,2796.68 ; MT3.9@-1369.68,2896.85 -1369.68,2796.68 ; IC3.15 -424.84,2181.85 -405.94,2200.75 -405.94,2326.85 -465.35,2386.26 -1190.98,2386.26 -1369.68,2564.96 -1369.68,2796.68
r10: IC3.1 MT2.14 MT3.14 | length 3216.6
  Top Layer w19.68: v1(-1875.59,2540.16) -1875.59,2536.22 -1874.8,2535.43 MT3.14@-1874.8,2898.82
  Bottom Layer w19.68: MT2.14@-3377.56,2898.82 -3377.56,2950.39 -3344.09,2983.86 -1886.22,2983.86 -1874.8,2972.44 MT3.14@-1874.8,2898.82 ; v1(-1875.59,2540.16) -1866.14,2540.16 -1613.35,2287.36 -786.46,2287.36 IC3.1
r11: IC3.2 MT2.8 MT3.8 | length 4915
  Bottom Layer w19.68: MT2.8@-2872.64,1769.49 -2872.64,1624.49 -2933.35,1563.78 -3688.98,1563.78 -3775.59,1650.39 -3775.59,1972.28 -3646.29,2101.57 -1836.02,2101.57 -1834.44,2103.15 -1497.24,2103.15 -1374.8,1980.71 ; MT3.8@-1374.8,1780.71 -1374.8,1980.71 ; IC3.2 -1346.5,2181.85 -1374.8,2153.54 -1374.8,1980.71
r12: IC3.3 MT2.12 MT3.12 | length 5088.2
  Top Layer w19.68: v1(-3820.87,3023.23) -3820.87,2690.94 v1(-3818.11,2688.19) ; v1(-1677.95,2529.92) -1674.8,2533.07 MT3.12@-1674.8,2898.82
  Bottom Layer w19.68: v1(-3820.87,3023.23) -1736.22,3023.23 -1674.8,2961.81 MT3.12@-1674.8,2898.82 ; v1(-3818.11,2688.19) -3818.11,2695.87 -3774.22,2739.76 -3269.68,2739.76 -3177.56,2831.89 MT2.12 MT2.12@-3177.56,2898.82 ; v1(-1677.95,2529.92) -1677.95,2499.21 -1520.12,2341.38 -723.71,2341.38 -700.94,2318.61 -700.94,2121.85 -740.94,2081.85 IC3.3
r13: IC3.4 MT2.1 MT3.1 | length 3920.4
  Bottom Layer w19.68: MT2.1@-3577.56,1780.71 -3577.56,1902.76 -3538.19,1942.13 -2111.42,1942.13 -2074.8,1905.51 -2074.8,1679.53 -1959.05,1563.78 -1697.47,1563.78 -1603.37,1469.68 -733.18,1469.68 -650.94,1551.92 -650.94,1851.85 IC3.4 ; MT2.1@-3572.64,1769.49 MT2.1@-3572.64,1779.02
r14: IC3.5 MT2.7 MT3.7 | length 4605.4
  Bottom Layer w19.68: MT2.7@-2972.64,1769.49 -2972.64,1640.75 -3010.24,1603.15 -3672.67,1603.15 -3736.22,1666.7 -3736.22,1955.97 -3629.98,2062.2 -1527.17,2062.2 -1474.8,2009.84 -1474.8,1737.4 -1440.16,1702.76 -1037.4,1702.76 -858.31,1881.85 IC3.5
r15: IC3.6 MT2.2 MT3.2 | length 4074
  Bottom Layer w19.68: MT2.2@-3477.56,1780.71 MT2.2 -3477.56,1723.62 -3519.29,1681.89 -3640.05,1681.89 -3657.48,1699.32 -3657.48,1893.31 -3567.32,1983.46 -2044.09,1983.46 -1974.8,1914.17 -1974.8,1709.06 -1868.9,1603.15 -1681.16,1603.15 -1587.07,1509.05 -749.49,1509.05 -695.94,1562.6 -695.94,1741.85 -735.94,1781.85 IC3.6
r16: IC3.7 MT2.5 MT3.5 | length 4187.8
  Bottom Layer w19.68: MT2.5@-3177.56,1780.71 MT2.5 -3177.56,1670.08 -3205.12,1642.52 -3656.36,1642.52 -3696.85,1683.01 -3696.85,1924.85 -3598.86,2022.83 -1707.87,2022.83 -1674.8,1989.76 -1674.8,1710.24 -1614.57,1650 -812.8,1650 IC3.7
right: CN1.1 R5.1 SW6.2 SW6.3 | length 9201.3
  Bottom Layer w19.68: SW6.2 -2101.63,-2423.23 -1603.4,-2423.23 SW6.3 ; R5.1 -1601.63,-2516 SW6.3 ; CN1.1 4.29,-402.72 121.26,-519.68 121.26,-2046.35 -716.76,-2884.37 -3438.87,-2884.37 -3628.9,-2694.34 -3628.9,-2438.9 -3535,-2345 -1620,-2345 -1601.63,-2363.37 SW6.3
thoat: CN1.6 R3.1 SW3.2 SW3.3 | length 2012.6
  Bottom Layer w19.68: SW3.2 -611,-1863.23 -112.77,-1863.23 SW3.3 ; R3.1 -111,-2076 SW3.3 ; CN1.6 -48.86,-902.72 3.15,-954.72 3.15,-1751.85 -110,-1865 SW3.3
top: CN1.4 R1.1 SW1.2 SW1.3 | length 3493.1
  Bottom Layer w19.68: R1.1 -2820,-1560 SW1.3 -2820,-1701.77 -2321.77,-1701.77 SW1.2 -2310.47,-1700 -2310.47,-1427.8 -2274.8,-1392.13 -1622.05,-1392.13 -932.64,-702.72 CN1.4
VCC: HD1.2 HD1.4 IC1.10 IC1.16 IC2.10 IC2.16 IC3.10 IC3.16 IC4.10 IC4.16 R1.2 R2.2 R3.2 R4.2 R5.2 R6.2 | length 20928.9
  Top Layer w19.68: v1(-3472.05,-1275.2) v1@-3472.05,-780.32 ; v1(-2870.08,-1275.98) -2870,-1275.91 v1@-2870,-779.13 ; v1(-1956.69,-868.11) -1956.69,-1265.35 v1(-1953.54,-1268.5) ; v1(-1250.51,-310.63) -1249.61,-311.54 v1(-1249.61,-666.14) ; IC1.16 -478.9,869.69 v1(-159.84,869.69) ; IC3.16 -365.94,2396.85 HD1.2
  Bottom Layer w19.68: R4.2 -3381.73,-2738.9 -2868.9,-2738.9 -2840,-2710 ; IC2.10 -3470,-775.28 v1@-3464.96,-780.32 ; v1@-2870.47,-802.36 -2870,-801.89 IC2.16 ; R6.2 -2778.13,-2648.13 -2840,-2710 ; R1.2 -2375,-1460 -2434.53,-1400.47 -2751.73,-1400.47 -2752.04,-1400.79 -3402.76,-1400.79 -3472.05,-1331.5 v1(-3472.05,-1275.2) ; R5.2 -2145.63,-2710 ; v1(-1956.69,-868.11) -1955.51,-866.93 IC4.10 ; v1(-1250.51,-310.63) -884.89,-310.63 -566.3,7.96 -566.3,182.28 IC1.10 ; v1@-1245.51,-640.63 v1@-1249.61,-644.72 ; HD1.4 -680.94,2706.85 -395.94,2706.85 ; R3.2 -560,-2520 -750,-2710 -1415,-2710 ; HD1.2 -365.94,2676.85 -395.94,2706.85 ; v1(-3472.05,-1275.2) -3541.22,-1275.2 -3573.9,-1307.87 -3573.9,-2248.54 -3530,-2292.44 -3530,-2300 -1480,-2300 R2.2 -1335,-2630 -1415,-2710 ; v1(-3472.05,-1275.2) -3452.95,-1256.1 -2878.15,-1256.1 -2870.08,-1264.17 v1(-2870.08,-1275.98) -1961.02,-1275.98 v1(-1953.54,-1268.5) -1631.27,-1268.5 -1355.51,-992.75 IC4.16 -1275.51,-670.63 v1@-1249.61,-644.72 ; -2840,-2710 -2145.63,-2710 ; -2145.63,-2710 -1415,-2710 ; v1@-1249.61,-644.72 v1(-1249.61,-666.14) -1186.1,-602.64 -726.82,-602.64 -65.75,58.43 -65.75,816.93 -118.5,869.69 v1(-159.84,869.69) -159.84,1022.18 -555.47,1417.81 -555.47,1672.32 -545.94,1681.85 IC3.10 -379.57,1681.85 -326.57,1734.84 -326.57,2306.22 -80.94,2551.85 -80.94,2671.85 -115.94,2706.85 -395.94,2706.85
  other v1: -3464.96,-804.33 -2870.47,-804.33
xung: CN2.1 IC1.11 IC2.11 IC3.11 IC4.11 | length 7258
  Top Layer w19.68: v1@-3380.32,-787.01 -3369.29,-798.03 v1(-3369.29,-1073.23) ; IC3.11 -473.5,1774.41 v1(-178.5,1774.41) ; v1(-362.6,286.61) -186.61,286.61 v1(-177.56,277.56) ; CN2.1@-201.3,382.28 CN2.1 CN2.1@-171.3,377.28 ; v1(-177.17,182.28) 89.76,182.28 v1(92.13,179.92)
  Bottom Layer w19.68: IC2.11 -3370,-782.36 v1@-3365.35,-787.01 ; v1(-3369.29,-1073.23) -3369.29,-1074.41 -3355.91,-1061.02 -3219.29,-1061.02 -3159.45,-1120.87 -2894.22,-1120.87 -2716.27,-942.91 -1915.35,-942.91 -1855.51,-883.07 IC4.11 -1855.51,-601.31 -1738.73,-484.53 -901.23,-484.53 -294.49,122.21 -294.49,218.5 v1(-362.6,286.61) -362.6,339.72 -390.16,367.28 IC1.11 ; v1(-177.17,182.28) -177.56,182.68 v1(-177.56,277.56) -176.3,278.82 CN2.1 ; v1@-173.39,1769.29 v1(-178.5,1774.41) -178.5,1209.15 92.13,938.52 v1(92.13,179.92)
  other v1: -3365.35,-804.33
pads on no net: CN5.7 CN5.8 CN6.1 CN6.2 CN6.3 CN6.8 CN6.9 CN6.10 IC4.9 SW1. SW2. SW3. SW4. SW5. SW6.

## Polygon pours and split planes (outlines as drawn)
GND on Bottom Layer "Bottom Layer-No Net" (solid, remove dead copper, pour order 2): -4732.28,3312.99 -4732.28,-3587.4 -4619.29,-3700.39 -4532.68,-3613.78 942.91,-3613.78 942.91,3495.67 882.28,3556.3

## Keep-outs
Keep-Out Layer:
  lines w10: -4580.71,-3200 526.77,-3200 526.77,3100 -4580.71,3100 -4580.71,-3200

## Other copper
Bottom Layer:
  text "Design by TranTrongPhuc" at -2642.52,-3076.38 h78.74